# Altium PCB Master_PCB.PcbDoc
Units mm, origin at the board's own origin, x right, y up, seen from the top; angles counter-clockwise.
Board outline 74.5 x 74 mm, 4 copper layers (Top Layer, Mid Layer 1, Mid Layer 2, Bottom Layer), stack 1.57 mm thick; 57 components, 58 nets, 240 pads, 100 vias.
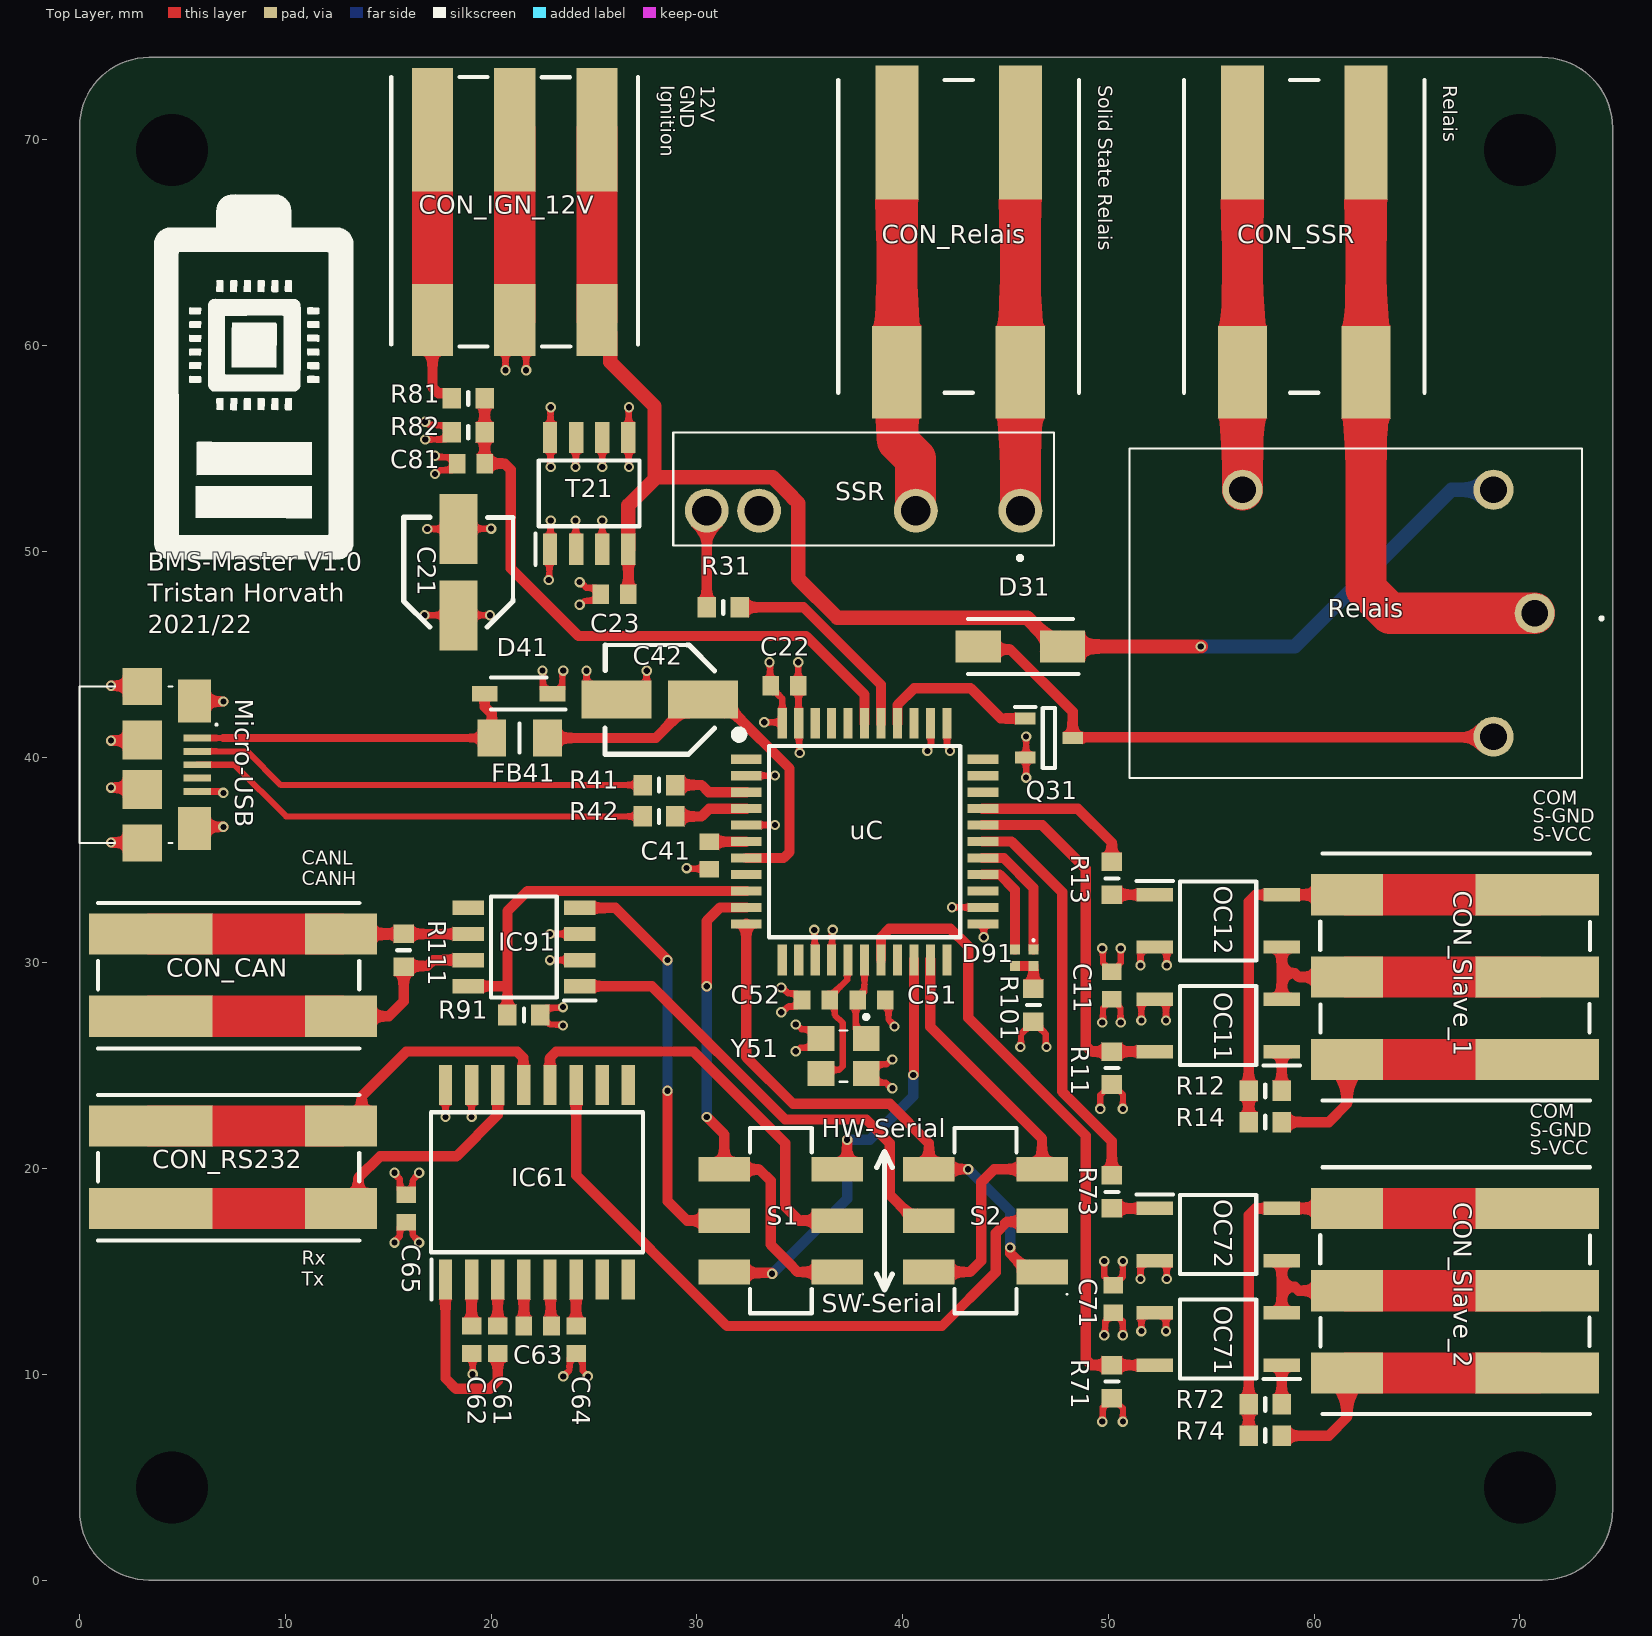
[diagram p0: Top Layer view]
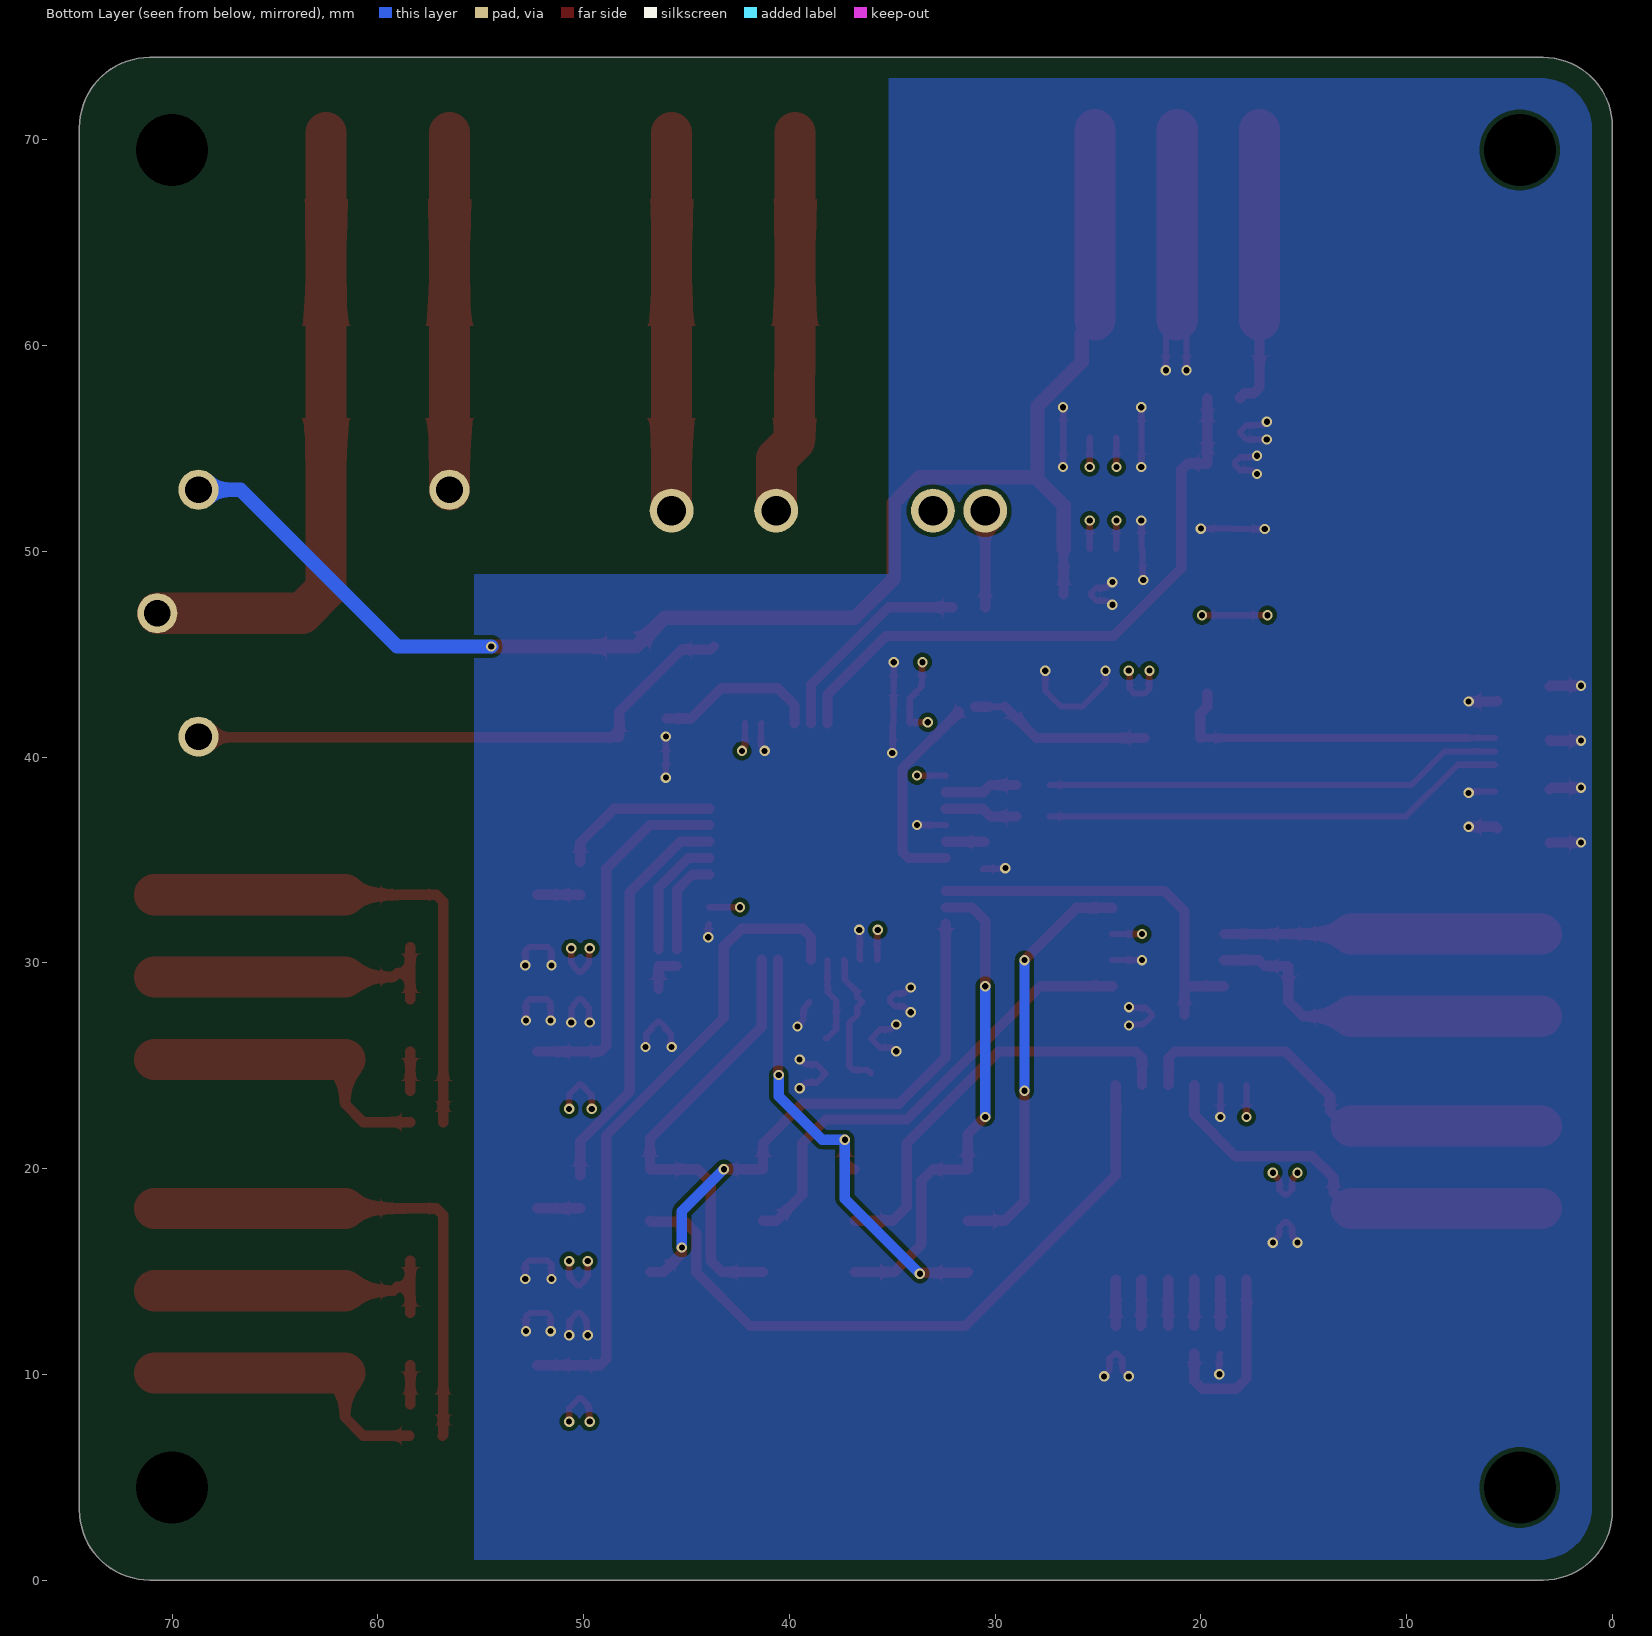
[diagram p1: Bottom Layer view, seen from below]
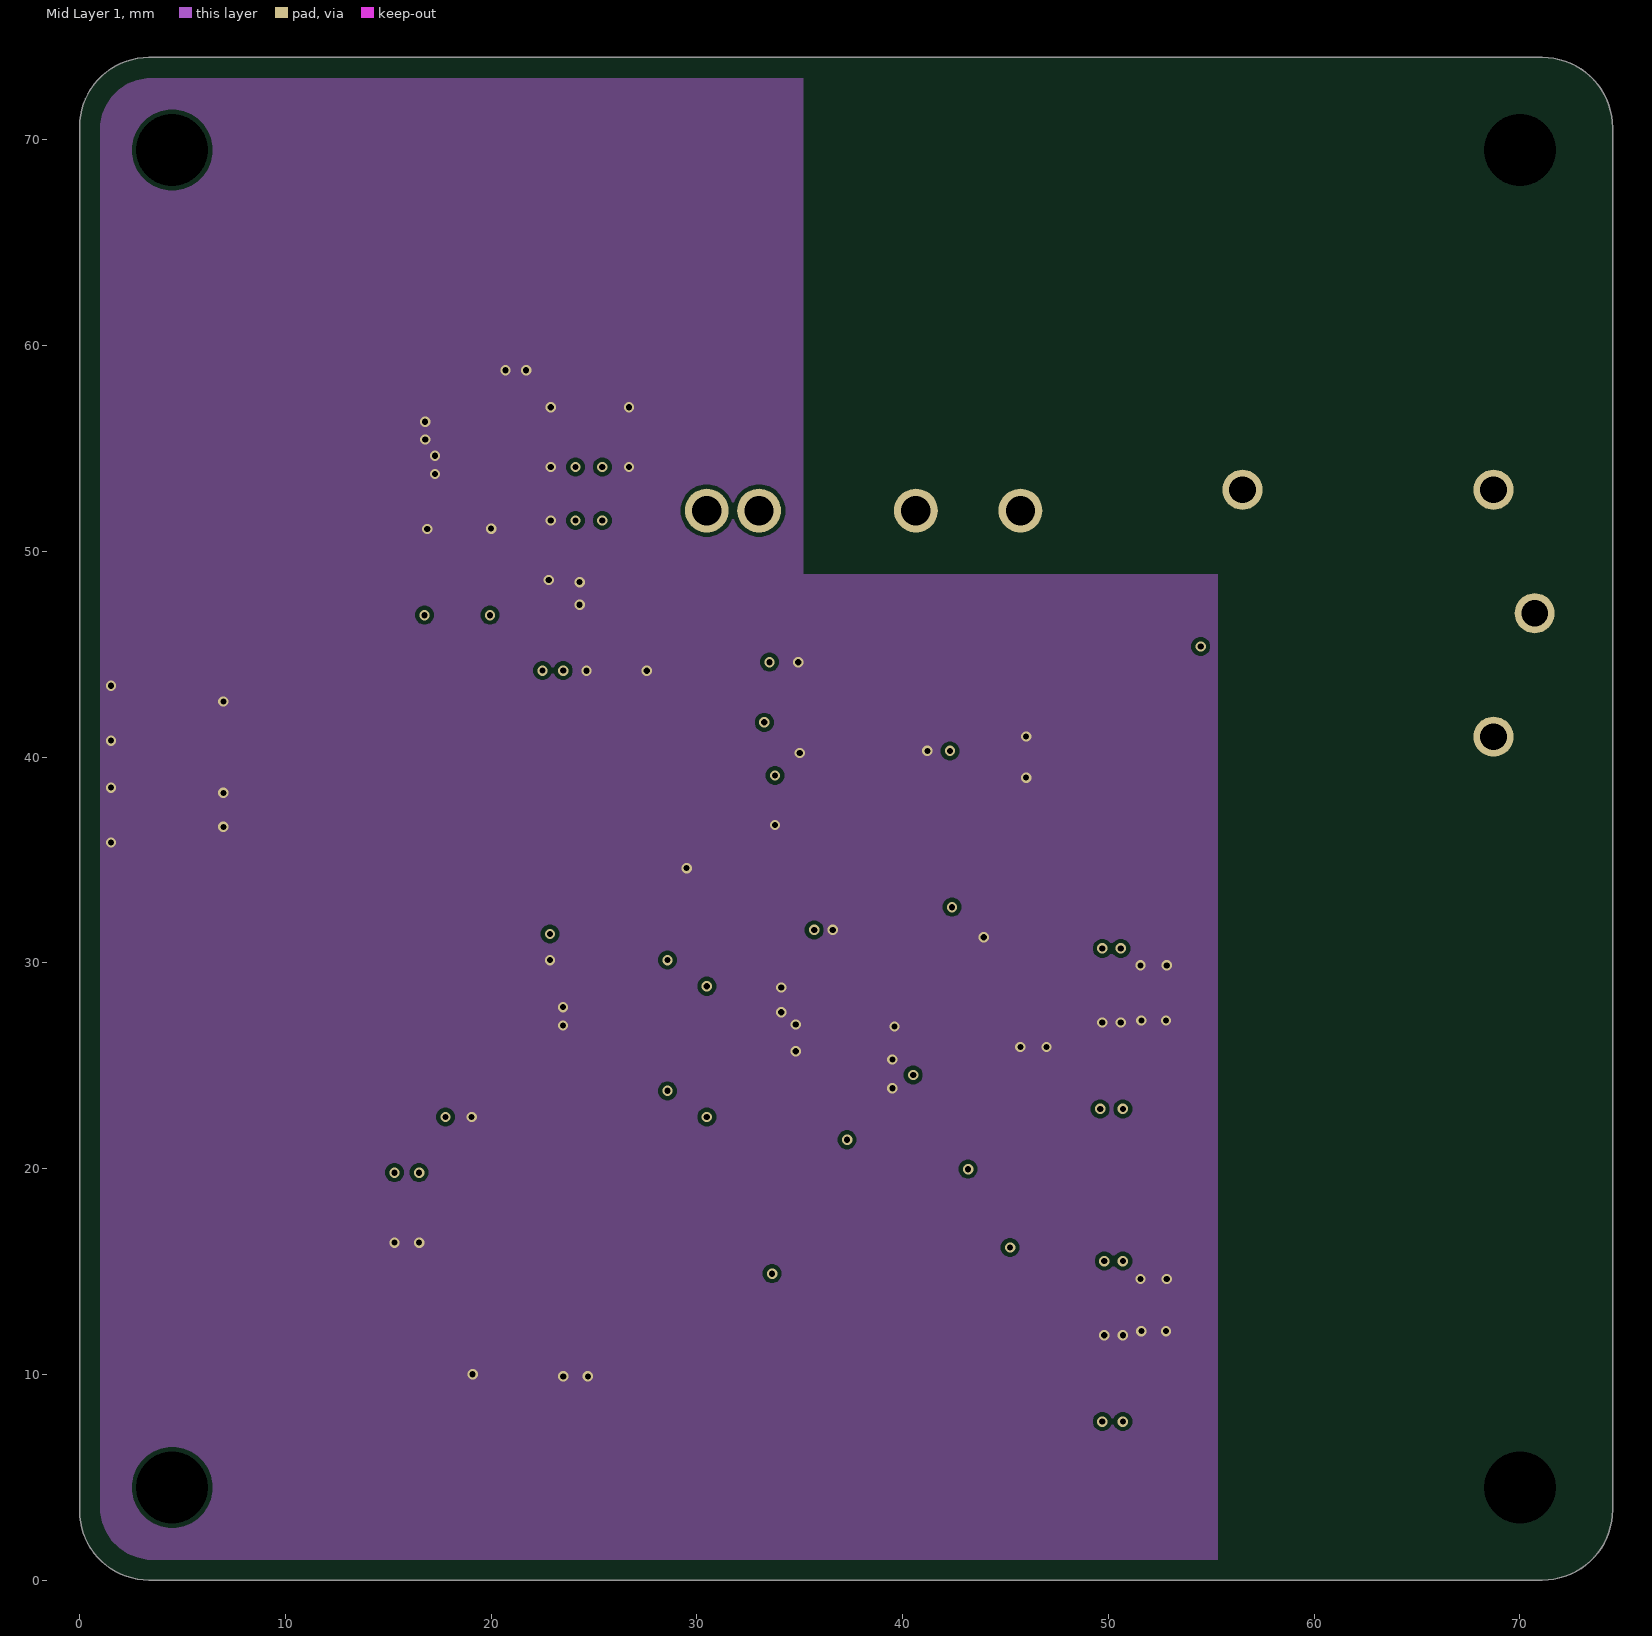
[diagram p2: Mid Layer 1]
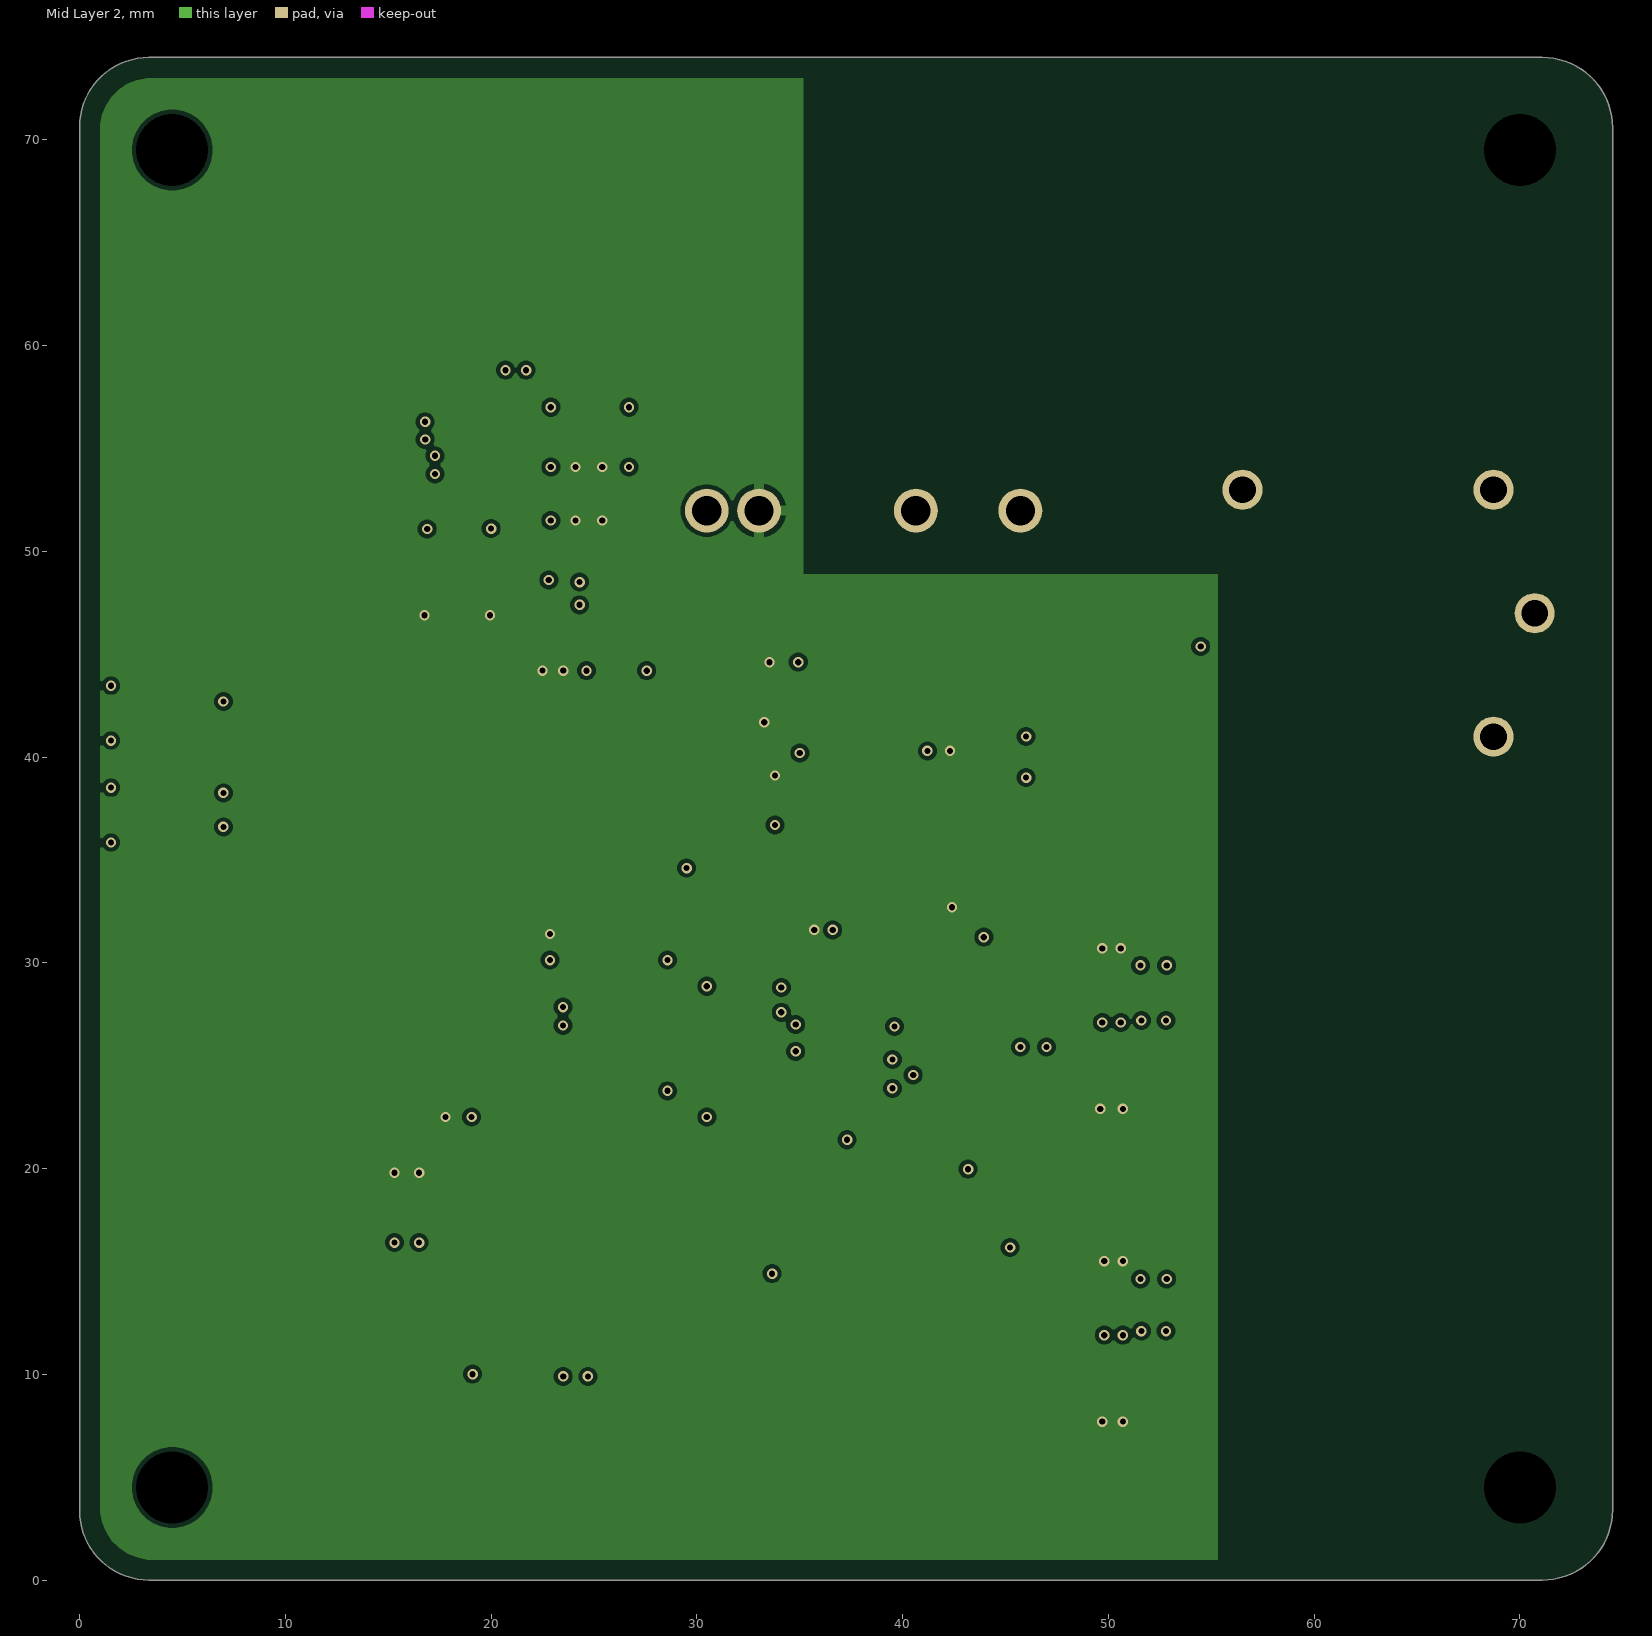
[diagram p3: Mid Layer 2]
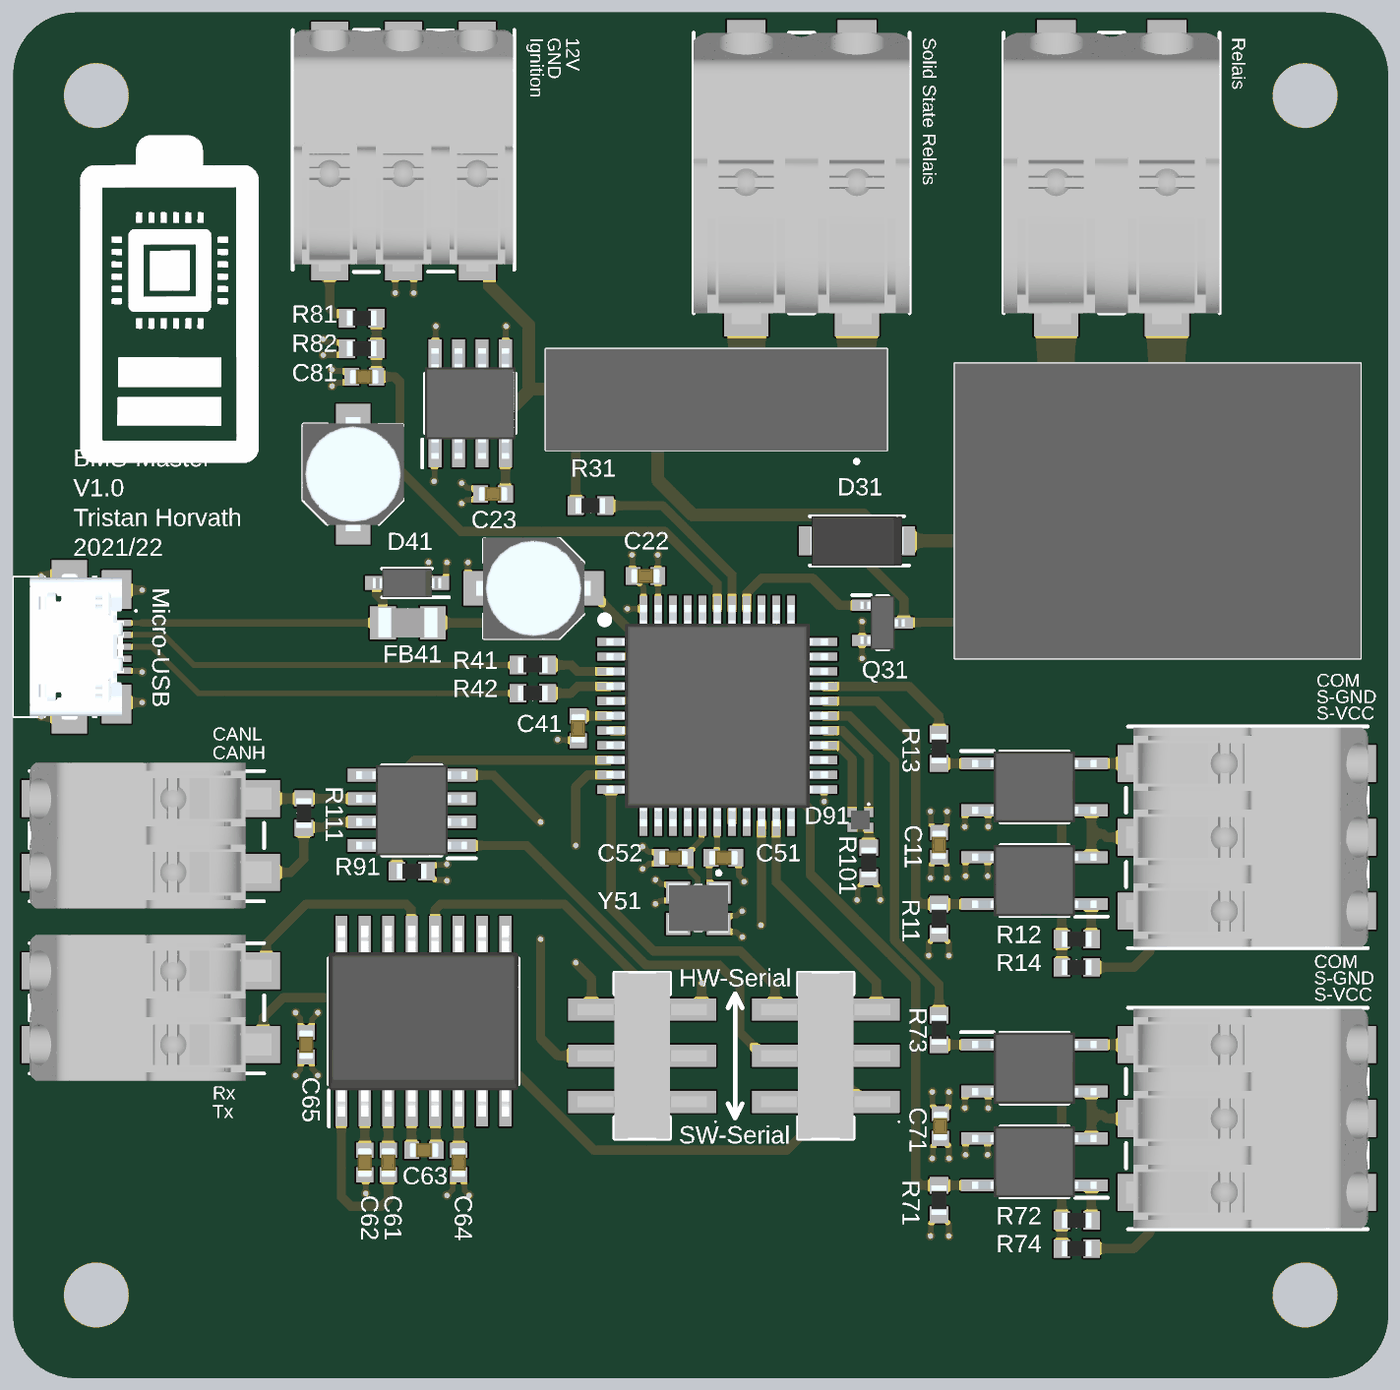
[diagram p4: 3D render of the assembled board from above, using the file's embedded part models]

## Layer stack, top to bottom
Top Solder: solder mask 0.0127, Solder Resist, Dk 3.8
Top Layer: signal copper 0.035
Dielectric 1: prepreg 0.1, 2313, Dk 4.05
Mid Layer 1: signal copper 0.0175
Core: core 1.265, FR-4, Dk 4.5
Mid Layer 2: signal copper 0.0175
Dielectric 2: prepreg 0.1, 2313, Dk 4.05
Bottom Layer: signal copper 0.035
Bottom Solder: solder mask 0.0127, Solder Resist, Dk 3.8

## Board outline
0,3.365 0,70.635 cw(c3.365,70.635) 3.365,74 71.086,74 cw(c71.086,70.586) 74.5,70.586 74.5,3.414 cw(c71.086,3.414) 71.086,0 3.365,0 cw(c3.365,3.365)

## Design rules (kind name [scope] priority, off if disabled: settings)
BoardOutlineClearance [All] p1: gap=0.2 ignorepadtopadclearanceinfootprint=FALSE except(0.4: Arc-SplitBarrior Arc-SplitContinuation Track-SplitBarrior Track-SplitContinuation SMDPad-SplitBarrior SMDPad-SplitContinuation THPad-SplitBarrior THPad-SplitContinuation Via-SplitBarrior Via-SplitContinuation Fill-SplitBarrior Fill-SplitContinuation Poly-SplitBarrior Poly-SplitContinuation Region-SplitBarrior Region-SplitContinuation Text-SplitBarrior Text-SplitContinuation)
Clearance "Clearance Bottom Layer" [OnLayer('Bottom Layer')] p1: gap=0.203 ignorepadtopadclearanceinfootprint=TRUE except(0.254: Arc-Text Track-Text SMDPad-Text THPad-Text Via-Text Fill-Text Poly-Text Region-Text Text-Text)
Clearance "Clearance Top Layer" [OnLayer('Top Layer')] p2: gap=0.203 ignorepadtopadclearanceinfootprint=TRUE except(0.254: Arc-Text Track-Text SMDPad-Text THPad-Text Via-Text Fill-Text Poly-Text Region-Text Text-Text)
Clearance [All] p3: gap=0.2 ignorepadtopadclearanceinfootprint=FALSE except(0.089: Arc-Arc Arc-Track Arc-SMDPad Track-Track Track-SMDPad SMDPad-SMDPad; 0.127: Arc-Via Track-Via SMDPad-Via THPad-Via Via-Via; 0.254: Arc-Text Track-Text SMDPad-Text THPad-Text Via-Text Fill-Text Poly-Text Region-Text Text-Text)
HoleSize [All] p1: absolutevalues=TRUE maxlimit=6.3 minlimit=0.2 maxpercent=80.000 minpercent=20.000
MinimumAnnularRing [All] p1: minimumring=0.076
MinimumSolderMaskSliver [All] p1: minsoldermaskwidth=0.1
PolygonConnect PolygonConnect_1 [All] p1: thpad.connectstyle=Relief thpad.reliefconductorwidth=0.508 thpad.reliefentries=4 thpad.polygonreliefangle="90 Angle" thpad.airgapwidth=0.254 smdpad.connectstyle=Relief smdpad.reliefconductorwidth=0.508 smdpad.reliefentries=4 smdpad.polygonreliefangle="90 Angle" smdpad.airgapwidth=0.254 via.connectstyle=Direct via.reliefconductorwidth=0.508 via.reliefentries=4 via.polygonreliefangle="90 Angle" via.airgapwidth=0.254
RoutingCorners [All] p1: cornerstyle=Round minsetback=2.54 maxsetback=2.54
RoutingVias [All] p1: holewidth=0.5 width=1 viastyle="Through Hole" minholewidth=0.2 minwidth=0.45 maxholewidth=1 maxwidth=2
SilkToSilkClearance [All] p1: silktosilkclearance=0.1
SilkToSolderMaskClearance [IsPad] p1: minsilkscreentomaskgap=0.1 clearancetoexposedcopper=TRUE
SolderMaskExpansion [All] p1: expansion=0.102 istentingtop=FALSE
Width [All] p1: maxlimit=2.54 minlimit=0.089 preferedwidth=0.381
25 further rules are at their usual default settings.

## Components (designator, comment, footprint, x,y, rotation, side; value= is the part's Value field where it differs from the comment)
C11 "100n" CAPC1608X90N 50.165,28.895 r90 top
C21 "47u" CAPAE530X550N 18.415,48.985 r90 top
C22 "100n" CAPC1608X90N 34.255,43.465 r180 top
C23 "470n" CAPC1608X90N 26,47.91 r0 top
C41 "1u" CAPC1608X90N 30.607,35.21 r90 top
C42 "10u" CAPAE530X550N 28.194,42.799 r180 top
C51 "18p" CAPC1608X90N 38.481,28.194 r180 top
C52 "18p" CAPC1608X90N 35.779,28.194 r0 top
C61 "1u" CAPC1608X90N 20.32,11.68 r270 top
C62 "1u" CAPC1608X90N 19.05,11.68 r90 top
C63 "1u" CAPC1608X90N 22.26,12.35 r180 top
C64 "1u" CAPC1608X90N 24.13,11.68 r90 top
C65 "1u" CAPC1608X90N 15.875,18.065 r270 top
C71 "100n" CAPC1608X90N 50.235,13.655 r90 top
C81 "15n" CAPC1608X90N 19.015,54.26 r0 top
CON_CAN "2060-452_998-404" 2060-452998-404 0.892,29.4 r0 top
CON_IGN_12V "2060-453_998-404" 2060-453998-404 21.145,73.053 r270 top
CON_Relais "2061-602_998-404" 2061-602998-404 42.72,72.905 r270 top
CON_RS232 "2060-452_998-404" 2060-452998-404 0.892,20.065 r0 top
CON_Slave_1 "2060-453_998-404" 2060-453998-404 73.403,29.305 r180 top
CON_Slave_2 "2060-453_998-404" 2060-453998-404 73.403,14.065 r180 top
CON_SSR "2061-602_998-404" 2061-602998-404 59.515,72.905 r270 top
D31 "ES1D-E3_61T" DIOM5127X229N 45.72,45.37 r180 top
D41 "BAT43W-E3-08" SOD3716X135N 21.336,43.084 r180 top
D91 "SML-P24MUWT86R" SMLP24MUWT86R 45.905,30.245 r180 top
FB41 "BLM31AJ601SN1L" BEADC3216X130N 21.383,40.925 r180 top
IC61 "MAX232IDWR" SOIC127P1030X265-16N 22.225,19.335 r90 top
IC91 "MCP2551-I_SN" SOIC127P600X175-8N 21.59,30.765 r180 top
Micro-USB "10118192-0002LF" 101181920002LF 2.853,39.625 r270 top
OC11 "FODM121GR4" SOP254P675X240-4N 55.332,26.955 r180 top
OC12 "FODM121GR4" SOP254P675X240-4N 55.332,32.035 r0 top
OC71 "FODM121GR4" SOP254P675X240-4N 55.332,11.715 r180 top
OC72 "FODM121GR4" SOP254P675X240-4N 55.332,16.795 r0 top
Q31 "XP234N0801TR-G" SOT95P240X115-3N 47.11,40.925 r0 top
R11 "10k" RESC1608X55N 50.165,24.885 r270 top
R12 "10k" RESC1608X55N 57.62,23.78 r180 top
R13 "1k" RESC1608X55N 50.165,34.105 r90 top
R14 "1k" RESC1608X55N 57.62,22.256 r0 top
R31 "220" RESC1608X55N 31.28,47.275 r180 top
R41 "22" RESC1608X55N 28.156,38.639 r180 top
R42 "22" RESC1608X55N 28.156,37.115 r180 top
R71 "10k" RESC1608X55N 50.165,9.645 r270 top
R72 "10k" RESC1608X55N 57.62,8.54 r180 top
R73 "1k" RESC1608X55N 50.165,18.865 r90 top
R74 "1k" RESC1608X55N 57.62,7.016 r0 top
R81 "18k" RESC1608X55N 18.885,57.435 r180 top
R82 "12k" RESC1608X55N 18.885,55.784 r0 top
R91 "N.P." RESC1608X55N 21.59,27.463 r0 top
R101 "220" RESC1608X55N 46.355,27.94 r90 top
R111 "120" RESC1608X55N 15.748,30.607 r90 top
Relais "JS1A-12V-F" JS1A12VF 70.715,46.99 r180 top
S1 "JS202011SCQN" JS202011SCQN 34.08,17.47 r90 top
S2 "JS202011SCQN" JS202011SCQN 44.025,17.47 r90 top
SSR "S202S02F" S202S12 38.1,52.674 r180 top
T21 "MC33269D-5.0G" SOIC127P600X175-8N 24.765,52.818 r90 top
uC "ATMEGA32U4RC-AU" QFP80P1200X1200X120-44N 38.147,35.892 r0 top
Y51 "QC3CA16.0000F12B23R" QC3CA160000F12B23R 37.127,25.47 r180 top

## Footprints (in the part's own frame and the unit in brackets; to place one, negate y for a bottom-side part, rotate by r counter-clockwise, add the part's x,y. Pads: shape width x height; smd on the part's side, far side on the other; paste and mask are expansions set on the pad)
2060-452998-404 [mm]
  rect 3.5x2 smd: 1(11.808,-2) 3(11.808,2)
  rect 6x2 smd: 2(2.558,-2) 4(2.558,2)
  silkscreen extent 0,-3.57 12.7,3.5, body extent 0,-3.95 13.1,3.95, height 5.5
2060-453998-404 [mm]
  rect 3.5x2 smd: 1(11.808,-4) 3(11.808,0) 5(11.808,4)
  rect 6x2 smd: 2(2.558,-4) 4(2.558,0) 6(2.558,4)
  silkscreen extent 0,-6 13.11,6, body extent 0,-5.95 13.1,5.95, height 5.5
2061-602998-404 [mm]
  rect 4.5x2.4 smd: 1(14.2,-3) 3(14.2,3)
  rect 6.5x2.1 smd: 2(2.558,-3) 4(2.558,3)
  silkscreen extent 0,-5.85 15.2,5.85, body extent 0,-5.85 15.8,5.85, height 6.75
101181920002LF [mm]
  rect 0.34x1.35 smd: 1(-1.3,2.862) 2(-0.65,2.862) 3(0,2.862) 4(0.65,2.862) 5(1.3,2.862)
  rect 2.1x1.6 smd: MP1(-3.1,2.737) MP6(3.1,2.737)
  rect 1.8x1.9 smd: MP2(-3.8,0.188) MP5(3.8,0.188)
  rect 1.9x1.9 smd: MP3(-1.2,0.188) MP4(1.2,0.188)
  silkscreen extent -3.8,-2.86 3.8,3.85, body extent -3.95,-1.95 3.95,3.15, height 2.77
BEADC3216X130N [mm]
  rect 1.4x1.8 smd: 1(-1.35,0) 2(1.35,0)
  silkscreen extent 0,-0.7 0,0.7, body extent -1.6,-0.8 1.6,0.8, height 1.3
CAPAE530X550N [mm]
  rect 3.4x1.85 smd: 1(-2.1,0) 2(2.1,0)
  silkscreen extent -2.67,-2.65 2.67,2.67, body extent -3.1,-2.75 3.1,2.75, height 5.5
CAPC1608X90N [mm]
  rect 0.81x0.94 smd: 1(-0.67,0) 2(0.67,0)
  body extent -0.8,-0.4 0.8,0.4, height 0.9
DIOM5127X229N [mm]
  rect 2.2x1.55 smd: 1(-2.05,0) 2(2.05,0)
  silkscreen extent -2.82,-1.33 2.55,1.33, body extent -2.55,-1.33 2.55,1.33, height 2.29
JS1A12VF [mm]
  round 1.95 hole 1.3: 1(0,0) 2(2,-6) 3(14.2,-6) 4(2,6)
  silkscreen extent -3.3,-8 19.7,8, body extent -2.3,-8 19.7,8, height 16.5
JS202011SCQN [mm]
  rect 1.2x2.5 smd: 1(-2.5,-2.75) 2(0,-2.75) 3(2.5,-2.75) 4(2.5,2.75) 5(0,2.75) 6(-2.5,2.75)
  silkscreen extent -4.5,-4 4.5,1.5, body extent -4.5,-3.5 4.5,3.5, height 5.65
QC3CA160000F12B23R [mm]
  rect 1.3x1.2 smd: 1(-1.1,-0.85) 2(1.1,-0.85) 3(1.1,0.85) 4(-1.1,0.85)
  silkscreen extent -1.2,-2 0.2,1.25, body extent -1.63,-1.33 1.63,1.33, height 1.2
QFP80P1200X1200X120-44N [mm]
  rect 1.5x0.446 smd: 1(-5.75,4) 2(-5.75,3.2) 3(-5.75,2.4) 4(-5.75,1.6) 5(-5.75,0.8) 6(-5.75,0) 7(-5.75,-0.8) 8(-5.75,-1.6) 9(-5.75,-2.4) 10(-5.75,-3.2) 11(-5.75,-4) 23(5.75,-4) 24(5.75,-3.2) 25(5.75,-2.4) 26(5.75,-1.6) 27(5.75,-0.8) 28(5.75,0) 29(5.75,0.8) 30(5.75,1.6) 31(5.75,2.4) 32(5.75,3.2) 33(5.75,4)
  rect 0.446x1.5 smd: 12(-4,-5.75) 13(-3.2,-5.75) 14(-2.4,-5.75) 15(-1.6,-5.75) 16(-0.8,-5.75) 17(0,-5.75) 18(0.8,-5.75) 19(1.6,-5.75) 20(2.4,-5.75) 21(3.2,-5.75) 22(4,-5.75) 34(4,5.75) 35(3.2,5.75) 36(2.4,5.75) 37(1.6,5.75) 38(0.8,5.75) 39(0,5.75) 40(-0.8,5.75) 41(-1.6,5.75) 42(-2.4,5.75) 43(-3.2,5.75) 44(-4,5.75)
  silkscreen extent -6.3,-4.65 4.65,5.4, body extent -6,-6 6,6, height 1.2
RESC1608X55N [mm]
  rect 0.9x1 smd: 1(-0.8,0) 2(0.8,0)
  silkscreen extent 0,-0.31 0,0.31, body extent -0.8,-0.41 0.8,0.41, height 0.55
S202S12 [mm]
  round 2.13 hole 1.42: 1(-7.62,0.7) 2(-2.54,0.7) 3(5.08,0.7) 4(7.62,0.7)
  silkscreen extent -9.25,-3.1 9.25,3.1, body extent -9.25,-3.1 9.25,2.4, height 5.1
SMLP24MUWT86R [mm]
  rect 0.5x0.5 smd mask+0.05: 1(-0.45,-0.4) 2(0.45,-0.4) 3(0.45,0.4) 4(-0.45,0.4)
  silkscreen extent -0.5,-0.9 -0.4,-0.8, body extent -0.5,-0.5 0.5,0.5, height 0.35
SOD3716X135N [mm]
  rect 1.25x0.75 smd: 1(-1.65,0) 2(1.65,0)
  silkscreen extent -2.27,-0.78 1.35,0.78, body extent -1.85,-0.77 1.85,0.77, height 1.35
SOIC127P600X175-8N [mm]
  rect 1.525x0.7 smd: 1(-2.712,1.905) 2(-2.712,0.635) 3(-2.712,-0.635) 4(-2.712,-1.905) 5(2.712,-1.905) 6(2.712,-0.635) 7(2.712,0.635) 8(2.712,1.905)
  silkscreen extent -3.48,-2.45 1.6,2.61, body extent -3,-2.45 3,2.45, height 1.75
SOIC127P1030X265-16N [mm]
  rect 1.95x0.65 smd: 1(-4.725,4.445) 2(-4.725,3.175) 3(-4.725,1.905) 4(-4.725,0.635) 5(-4.725,-0.635) 6(-4.725,-1.905) 7(-4.725,-3.175) 8(-4.725,-4.445) 9(4.725,-4.445) 10(4.725,-3.175) 11(4.725,-1.905) 12(4.725,-0.635) 13(4.725,0.635) 14(4.725,1.905) 15(4.725,3.175) 16(4.725,4.445)
  silkscreen extent -5.7,-5.15 3.4,5.15, body extent -5.17,-5.15 5.17,5.15, height 2.59
SOP254P675X240-4N [mm]
  rect 1.775x0.65 smd: 1(-3.088,1.27) 2(-3.088,-1.27) 3(3.088,-1.27) 4(3.088,1.27)
  silkscreen extent -3.98,-1.93 1.85,1.94, body extent -3.37,-1.92 3.37,1.92, height 2.4
SOT95P240X115-3N [mm]
  rect 1x0.6 smd: 1(-1.15,0.95) 2(-1.15,-0.95) 3(1.15,0)
  silkscreen extent -1.65,-1.45 0.3,1.5, body extent -1.2,-1.45 1.2,1.45, height 1.15

## Part data
C11 C22 C23 C41 C51 C52 C61 C62 C63 C64 C65 C71 C81: library part CAP
C21 C42: library part ELKO
CON_CAN CON_RS232: "Connector", Arrow Part Number=2060-452/998-404, Manufacturer_Name=Wago, Manufacturer_Part_Number=2061-602/998-404, Arrow Price/Stock=https://www.arrow.com/en/products/2060-452998-404/wago-kontakttechnik-gmbh?region=nac
CON_IGN_12V CON_Relais CON_Slave_1 CON_Slave_2 CON_SSR: "Connector", Arrow Part Number=2060-452/998-404, Manufacturer_Name=Wago, Arrow Price/Stock=https://www.arrow.com/en/products/2060-452998-404/wago-kontakttechnik-gmbh?region=nac, Manufacturer_Part_Number=2060-452/998-404
D31: "Diode", Arrow Part Number=ES1D-E3/61T, Manufacturer_Name=Vishay, Mouser Part Number=625-ES1D-E3, Arrow Price/Stock=https://www.arrow.com/en/products/es1d-e361t/vishay, Datasheet Link=https://componentsearchengine.com/Datasheets/2/ES1D-E3_61T.pdf, Height=2.29mm, Manufacturer_Part_Number=ES1D-E3/61T, Mouser Price/Stock=https://www.mouser.co.uk/ProductDetail/Vishay-General-Semiconductor/ES1D-E3-61T?qs=rfh7uIuiIO0XwaKoN5aNdQ%3D%3D
D41: "Diode", Manufacturer_Name=Vishay, Mouser Part Number=78-BAT43W-E3-08, Arrow Part Number=BAT43W-E3-08, Arrow Price/Stock=https://www.arrow.com/en/products/bat43w-e3-08/vishay?region=nac, Datasheet Link=https://www.arrow.com/en/products/bat43w-e3-08/vishay, Height=1.35mm, Manufacturer_Part_Number=BAT43W-E3-08, Mouser Price/Stock=https://www.mouser.co.uk/ProductDetail/Vishay-Semiconductors/BAT43W-E3-08?qs=KP8Io%2FXyE5RCw3lmmA3XwQ%3D%3D
D91: "LED", Manufacturer_Name="ROHM Semiconductor", Mouser Part Number=755-SML-P24MUWT86R, Datasheet Link=https://datasheet.datasheetarchive.com/originals/distributors/DKDS-18/357144.pdf, Height=0.25mm, Manufacturer_Part_Number=SML-P24MUWT86R, Mouser Price/Stock=https://www.mouser.co.uk/ProductDetail/ROHM-Semiconductor/SML-P24MUWT86R?qs=SP2aZMzhwxgr8eZ6SbTI9w%3D%3D
FB41: "Ferrite Bead", Manufacturer_Name="Murata Electronics", Mouser Part Number=81-BLM31A601S, Arrow Part Number=BLM31AJ601SN1L, Arrow Price/Stock=https://www.arrow.com/en/products/blm31aj601sn1l/murata-manufacturing, Datasheet Link=https://www.mouser.com/datasheet/2/281/c31e-794748.pdf, Height=1.3mm, Manufacturer_Part_Number=BLM31AJ601SN1L, Mouser Price/Stock=https://www.mouser.co.uk/ProductDetail/Murata-Electronics/BLM31AJ601SN1L?qs=eh6oC%2F9l24qWxAxwNnqXlg%3D%3D
IC61: "Integrated Circuit", Manufacturer_Name="Texas Instruments", Mouser Part Number=595-MAX232IDWR, Arrow Part Number=MAX232IDWR, Arrow Price/Stock=https://www.arrow.com/en/products/max232idwr/texas-instruments?region=nac, Datasheet Link=http://www.ti.com/lit/gpn/max232?HQS=ti-null-null-sf-df-pf-sep-wwe&DCM=yes, Height=2.65mm, Manufacturer_Part_Number=MAX232IDWR, Mouser Price/Stock=https://www.mouser.co.uk/ProductDetail/Texas-Instruments/MAX232IDWR?qs=NLW4NjXEBS5p6v4OAKxw4g%3D%3D
IC91: "Integrated Circuit", Arrow Part Number=MCP2551-I/SN, Manufacturer_Name=Microchip, Mouser Part Number=579-MCP2551-I/SN, Arrow Price/Stock=https://www.arrow.com/en/products/mcp2551-isn/microchip-technology?region=nac, Datasheet Link=https://datasheet.datasheetarchive.com/originals/distributors/Datasheets-34/DSA-674994.pdf, Height=1.75mm, Manufacturer_Part_Number=MCP2551-I/SN, Mouser Price/Stock=https://www.mouser.co.uk/ProductDetail/Microchip-Technology/MCP2551-I-SN?qs=9y3LFqDLL8L5zFfqqxdOHg%3D%3D
Micro-USB: "Connector", Manufacturer_Name=Amphenol, Mouser Part Number=649-10118192-0002LF, Arrow Part Number=10118192-0002LF, Arrow Price/Stock=https://www.arrow.com/en/products/10118192-0002lf/amphenol-fci?region=nac, Datasheet Link=https://componentsearchengine.com/Datasheets/1/10118192-0002LF.pdf, Height=3.05mm, Manufacturer_Part_Number=10118192-0002LF, Mouser Price/Stock=https://www.mouser.co.uk/ProductDetail/Amphenol-FCI/10118192-0002LF?qs=KVgMXE4aH4nIkuWlMxQzog%3D%3D
OC11 OC12 OC71 OC72: "Integrated Circuit", Manufacturer_Name="ON Semiconductor", Mouser Part Number=863-FODM121GR4, Datasheet Link=https://www.onsemi.com/pub/Collateral/FODM2705-D.pdf, Height=2.4mm, Manufacturer_Part_Number=FODM121GR4, Mouser Price/Stock=https://www.mouser.co.uk/ProductDetail/onsemi/FODM121GR4?qs=byeeYqUIh0Okw76KHw6rZA%3D%3D
Q31: "MOSFET (N-Channel)", Manufacturer_Name=Torex, Mouser Part Number=865-XP234N0801TR-G, Datasheet Link=https://4donline.ihs.com/images/VipMasterIC/IC/TOSL/TOSL-S-A0008892481/TOSL-S-A0008892481-1.pdf?hkey=CECEF36DEECDED6468708AAF2E19C0C6, Height=1.15mm, Manufacturer_Part_Number=XP234N0801TR-G, Mouser Price/Stock=https://www.mouser.co.uk/ProductDetail/Torex-Semiconductor/XP234N0801TR-G?qs=BJlw7L4Cy7%252BWe%2FbHvnXcKQ%3D%3D
R11 R12 R13 R14 R31 R41 R42 R71 R72 R73 R74 R81 R82 R91 R101 R111: library part RES
Relais: "Relay or Contactor", Manufacturer_Name=Panasonic, Mouser Part Number=769-JS1A-12V-F, Arrow Part Number=JS1A-12V-F, Arrow Price/Stock=https://www.arrow.com/en/products/js1a-12v-f/panasonic, Datasheet Link=https://componentsearchengine.com/Datasheets/2/JS1A-12V-F.pdf, Height=16.4mm, Manufacturer_Part_Number=JS1A-12V-F, Mouser Price/Stock=https://www.mouser.co.uk/ProductDetail/Panasonic/JS1A-12V-F?qs=sEN%2FkO1EG6bHk8GQE7PEaQ%3D%3D
S1 S2: "Switch", Manufacturer_Name="C & K COMPONENTS", Mouser Part Number=611-JS202011SCQN, Arrow Part Number=JS202011SCQN, Arrow Price/Stock=https://www.arrow.com/en/products/js202011scqn/ck?region=nac, Datasheet Link=http://www.ckswitches.com/media/1422/js.pdf, Height=5.5mm, Manufacturer_Part_Number=JS202011SCQN, Mouser Price/Stock=https://www.mouser.co.uk/ProductDetail/CK/JS202011SCQN?qs=LgMIjt8LuD95JYWxZ7NvZA%3D%3D
SSR: "Relay or Contactor", Manufacturer_Name="Sharp Microelectronics", Mouser Part Number=N/A, Datasheet Link=https://componentsearchengine.com/Datasheets/1/S202S02F.pdf, Height=5mm, Manufacturer_Part_Number=S202S02F, Mouser Price/Stock=https://www.mouser.co.uk/ProductDetail/Sharp-Microelectronics/S202S02F?qs=ijfXDZrNBl2UPSyCAmWZ0A%3D%3D
T21: "Integrated Circuit", Manufacturer_Name="ON Semiconductor", Mouser Part Number=863-MC33269D-5.0G, Arrow Part Number=MC33269D-5.0G, Arrow Price/Stock=https://www.arrow.com/en/products/mc33269d-5.0g/on-semiconductor?region=nac, Datasheet Link=http://www.onsemi.com/pub/Collateral/MC33269-D.PDF, Height=1.75mm, Manufacturer_Part_Number=MC33269D-5.0G, Mouser Price/Stock=https://www.mouser.co.uk/ProductDetail/onsemi/MC33269D-50G?qs=dFKnUM%2FquJZ0YuZ%252B66PKCA%3D%3D
uC: "Integrated Circuit", Manufacturer_Name=Microchip, Mouser Part Number=556-ATMEGA32U4RC-AU, Arrow Part Number=ATMEGA32U4RC-AU, Arrow Price/Stock=https://www.arrow.com/en/products/atmega32u4rc-au/microchip-technology?region=nac, Datasheet Link=http://uk.rs-online.com/web/p/products/7380451, Height=1.2mm, Manufacturer_Part_Number=ATMEGA32U4RC-AU, Mouser Price/Stock=https://www.mouser.co.uk/ProductDetail/Microchip-Technology-Atmel/ATMEGA32U4RC-AU?qs=7AReRZHh%2FSt%252BRqfzkW8%2FkA%3D%3D
Y51: "Crystal or Oscillator", Manufacturer_Name=Qantek, Height=1.1mm, Manufacturer_Part_Number=QC3CA16.0000F12B23R

## Free pads (board coordinates)
  round 1.524 hole 3.5: 2(4.5,4.5) 2(4.5,69.5) 2(70,4.5) 2(70,69.5)

## Via types
v1: diameter 0.5, hole 0.3, Top Layer to Bottom Layer, tented both sides, 100 vias

## Nets (pads, with @x,y where several pads share a name; then routed paths per layer and width w, separated by ;. In a path a pad name is that pad's centre, name@x,y a point inside that pad or via, vN(x,y) a via of type N, cw(c..) or ccw(c..) an arc to the next point about the centre after c; other vN are vias at no path point)
M_GND: C11.1 C21.2 C22.1 C23.1 C41.1 C42.2 C51.1 C52.1 C62.1 C64.1 C65.2 C71.1 C81.1 CON_IGN_12V.3 CON_IGN_12V.4 IC61.15 IC91.2 Micro-USB.5 Micro-USB.MP1 Micro-USB.MP2 Micro-USB.MP3 Micro-USB.MP4 Micro-USB.MP5 Micro-USB.MP6 OC11.3 OC12.2 OC71.3 OC72.2 Q31.2 R82.1 R91.2 R101.1 T21.1 T21.5 T21.8 uC.5 uC.15 uC.23 uC.35 uC.43 Y51.2 Y51.4 | length 104.8
  Top Layer w0.3: Micro-USB.5 6.864,38.325 6.931,38.258 v1(6.985,38.258) ; v1(15.3,16.4) 15.3,16.454 15.555,16.709 15.555,17.14 15.81,17.395 15.94,17.395 16.195,17.14 16.195,16.759 16.5,16.454 v1(16.5,16.4) ; v1(16.791,56.292) 16.818,56.292 16.976,56.134 17.785,56.134 18.085,55.834 18.085,55.734 17.785,55.434 v1(16.795,55.434) ; v1(16.891,51.085) C21.2 18.43,51.1 v1(20,51.1) ; v1(17.272,53.752) 17.326,53.752 17.514,53.94 18.09,53.94 18.345,54.195 18.345,54.325 18.09,54.58 17.474,54.58 17.451,54.603 17.31,54.603 v1(17.272,54.641) ; C62.1 19.1,10.96 v1(19.1,10.005) ; v1(19.05,22.51) IC61.15 ; v1(20.7,58.8) 20.7,60.8 CON_IGN_12V.3 21.7,60.69 v1(21.7,58.8) ; v1(22.8,48.6) 22.83,48.63 22.83,50.076 22.88,50.126 22.88,51.48 v1(22.9,51.5) ; v1(22.86,30.13) IC91.2 ; v1(22.9,54.1) 22.88,54.12 22.88,55.51 T21.8 22.88,55.55 22.88,56.98 v1(22.9,57) ; v1(23.495,26.955) 23.457,26.993 22.86,26.993 22.74,27.113 22.69,27.113 22.39,27.413 R91.2 22.39,27.513 22.69,27.813 23.464,27.813 v1(23.495,27.844) ; v1(23.5,9.9) 23.81,10.21 23.81,10.755 24.065,11.01 24.195,11.01 24.45,10.755 24.45,10.176 24.7,9.926 v1(24.7,9.9) ; v1(24.3,47.4) 24.354,47.4 24.544,47.59 25.075,47.59 25.33,47.845 25.33,47.975 25.075,48.23 24.624,48.23 24.354,48.5 v1(24.3,48.5) ; v1(24.638,44.196) 24.638,43.574 25.763,42.449 26.784,42.449 27.559,43.224 v1(27.559,44.196) ; v1(26.7,54.1) 26.685,54.115 26.685,55.515 T21.5 26.685,55.545 26.685,56.985 v1(26.7,57) ; v1(29.5,34.6) 29.53,34.57 30.577,34.57 C41.1 ; uC.5 32.401,36.696 33.796,36.696 v1(33.8,36.7) ; v1(34.1,27.596) 34.154,27.596 34.432,27.874 34.854,27.874 35.109,28.129 35.109,28.259 34.854,28.514 34.436,28.514 34.154,28.796 v1(34.1,28.796) ; v1(34.8,25.7) 34.854,25.7 35.024,25.87 35.577,25.87 Y51.2 35.577,26.77 35.084,26.77 34.854,27 v1(34.8,27) ; v1(34.925,44.608) C22.1 34.936,43.454 34.936,41.653 uC.43 34.973,41.615 34.973,40.227 v1(35,40.2) ; uC.15 36.573,30.168 36.573,31.573 v1(36.6,31.6) ; C51.1@39.059,28.098 39.059,28.033 39.314,27.778 39.314,27.24 39.6,26.954 v1(39.6,26.9) ; v1(39.5,23.9) 39.446,23.9 39.176,24.17 38.677,24.17 Y51.4 38.677,25.07 39.216,25.07 39.446,25.3 v1(39.5,25.3) ; v1(41.2,40.3) 41.2,40.354 41.374,40.529 41.374,41.614 uC.35 ; uC.23 43.942,31.847 v1(43.942,31.242) ; v1(45.72,25.908) 45.758,25.946 45.758,26.543 46.005,26.79 46.005,26.84 46.305,27.14 R101.1 46.405,27.14 46.705,26.84 46.705,26.79 46.952,26.543 46.952,25.946 v1(46.99,25.908) ; v1(46,39) 46,39.935 Q31.2 46,40.015 v1(46,41) ; v1(49.7,27.1) 49.738,27.138 49.738,27.798 49.845,27.905 49.845,27.97 50.1,28.225 50.23,28.225 50.485,27.97 50.485,27.905 50.59,27.8 50.59,27.11 v1(50.6,27.1) ; v1(49.8,11.9) 49.838,11.938 49.838,12.588 49.915,12.665 49.915,12.73 50.17,12.985 50.3,12.985 50.7,12.585 v1(50.7,11.9) ; v1(51.562,14.636) 51.562,15.35 51.737,15.525 OC72.2 52.657,15.525 52.832,15.35 v1(52.832,14.636) ; v1(51.562,29.876) 51.562,30.59 51.737,30.765 OC12.2 52.657,30.765 52.832,30.59 v1(52.832,29.876) ; v1(51.6,12.1) 51.6,12.81 51.775,12.985 52.625,12.985 52.8,12.81 v1(52.8,12.1) ; v1(51.6,27.2) 51.6,28.05 51.775,28.225 52.625,28.225 52.8,28.05 v1(52.8,27.2)
  Top Layer w0.5: v1(1.524,35.845) 3.021,35.845 Micro-USB.MP5 ; v1(1.524,38.512) 2.954,38.512 Micro-USB.MP4 ; v1(1.524,40.798) 3.014,40.798 Micro-USB.MP3 ; v1(1.524,43.465) 3.001,43.465 Micro-USB.MP2 ; Micro-USB.MP6 5.672,36.607 v1(6.985,36.607) ; Micro-USB.MP1 5.612,42.703 v1(6.985,42.703)
  Top Layer w2: CON_IGN_12V.3 CON_IGN_12V.4
M_Vcc: C11.2 C21.1 C22.2 C65.1 C71.2 D41.1 IC61.16 IC91.3 R11.2 R71.2 SSR.3 T21.2 T21.3 T21.6 T21.7 uC.2 uC.14 uC.24 uC.34 uC.44 | length 39.1
  Top Layer w0.3: v1(15.3,19.8) 15.3,19.746 15.555,19.491 15.555,18.99 15.81,18.735 15.94,18.735 16.195,18.99 16.195,19.441 16.5,19.746 v1(16.5,19.8) ; v1(16.764,46.894) 18.406,46.894 C21.1 18.424,46.894 v1(19.939,46.894) ; v1(17.78,22.51) IC61.16 ; v1(22.5,44.2) 22.511,44.189 22.511,43.309 22.736,43.084 23.236,43.084 23.461,43.309 23.461,44.107 23.5,44.146 v1(23.5,44.2) ; v1(22.86,31.4) IC91.3 ; v1(24.1,51.5) 24.115,51.485 24.115,50.121 T21.2 ; v1(24.1,54.1) 24.115,54.115 24.115,55.515 T21.7 ; T21.3 v1(25.4,51.5) ; v1(25.4,54.1) T21.6 ; uC.2 32.401,39.096 33.796,39.096 v1(33.8,39.1) ; SSR.3@33.02,51.479 SSR.3 ; v1(33.274,41.687) 34.102,41.687 uC.44 34.147,42.842 33.844,43.145 33.84,43.145 33.585,43.4 C22.2 33.585,43.53 33.556,43.559 33.556,44.58 v1(33.528,44.608) ; v1(35.7,31.6) 35.723,31.577 35.723,30.165 uC.14 ; uC.34 42.155,41.633 42.155,40.499 42.3,40.354 v1(42.3,40.3) ; v1(42.4,32.7) 42.404,32.696 43.893,32.696 uC.24 ; v1(49.6,22.9) 49.6,23.57 50.115,24.085 50.215,24.085 50.7,23.6 v1(50.7,22.9) ; v1(49.7,7.7) 49.72,7.72 49.72,8.4 49.815,8.495 49.815,8.545 50.115,8.845 50.215,8.845 50.7,8.36 v1(50.7,7.7) ; v1(49.7,30.7) 49.73,30.67 49.73,30 49.845,29.885 49.845,29.82 50.1,29.565 50.23,29.565 50.485,29.82 50.485,29.885 50.6,30 v1(50.6,30.7) ; v1(49.8,15.5) 49.8,14.76 49.915,14.645 49.915,14.58 50.17,14.325 50.3,14.325 50.7,14.725 v1(50.7,15.5)
NetC23_2: C23.2 CON_IGN_12V.5 CON_IGN_12V.6 D31.1 Relais.2 T21.4 | length 73.8
  Top Layer w0.5: C23.2 T21.4
  Top Layer w0.7: CON_IGN_12V.5 25.795,60.595 25.795,59.199 27.94,57.054 27.94,53.498 ; T21.4 26.67,52.228 27.94,53.498 ; v1(54.483,45.37) 47.445,45.37 47.02,45.795 46.048,46.767 36.83,46.767 34.925,48.672 34.925,52.343 34.638,52.63 34.638,52.644 33.69,53.592 28.034,53.592 27.94,53.498
  Top Layer w2: CON_IGN_12V.5 CON_IGN_12V.6
  Bottom Layer w0.7: v1(54.483,45.37) 59.055,45.37 66.675,52.99 Relais.2
NetC41_2: C41.2 uC.6 | length 1.9
  Top Layer w0.5: C41.2@30.503,35.868 30.515,35.88 uC.6@32.385,35.88
NetC42_1: C42.1 FB41.1 uC.7 | length 19
  Top Layer w0.3: C42.1@29.519,42.449 C42.1@30.294,42.449
  Top Layer w0.5: FB41.1 27.995,40.925 C42.1@29.519,42.449 ; C42.1@30.294,42.449 C42.1@30.962,42.449 ; C42.1@31.75,42.195 34.503,39.442 34.503,35.385 34.21,35.092 uC.7
NetC51_2: C51.2 uC.17 Y51.1 | length 4.2
  Top Layer w0.3: uC.17 38.147,28.591 37.719,28.163 37.719,26.778 38.177,26.32 Y51.1
NetC52_2: C52.2 uC.16 Y51.3 | length 7
  Top Layer w0.3: Y51.3 36.203,24.796 36.908,24.796 37.084,24.972 37.084,27.082 36.704,27.462 36.704,27.843 36.449,28.098 36.704,28.353 36.704,28.573 37.305,29.174 37.305,30.1 uC.16
NetC61_1: C61.1 IC61.3 | length 2.3
  Top Layer w0.5: C61.1 IC61.3
NetC61_2: C61.2 IC61.1 | length 9
  Top Layer w0.5: IC61.1 17.78,9.81 18.288,9.302 19.939,9.302 20.32,9.683 C61.2
NetC62_2: C62.2 IC61.2 | length 2.3
  Top Layer w0.5: C62.2 IC61.2
NetC63_1: C63.1 IC61.5 | length 2.3
  Top Layer w0.5: IC61.5 22.895,14.575 22.895,12.385 C63.1
NetC63_2: C63.2 IC61.4 | length 2.3
  Top Layer w0.5: C63.2 IC61.4
NetC64_2: C64.2 IC61.6 | length 2.3
  Top Layer w0.5: C64.2 IC61.6
NetC81_2: C81.2 R81.1 R82.2 uC.39 | length 30.5
  Top Layer w0.5: R81.1 R82.2 C81.2 20.662,54.26 20.955,53.967 20.955,49.18 24.255,45.88 35.304,45.88 38.147,43.037 uC.39
NetCON_CAN_1: CON_CAN.1 CON_CAN.2 IC91.7 R111.1 | length 17.6
  Top Layer w0.5: CON_CAN.1 15.021,27.4 15.748,28.127 R111.1 15.786,29.845 16.891,29.845 17.176,30.13 IC91.7 IC91.7@18.855,30.107
  Top Layer w2: CON_CAN.2 CON_CAN.1
NetCON_CAN_3: CON_CAN.3 CON_CAN.4 IC91.6 R111.2 | length 15.4
  Top Layer w0.5: CON_CAN.3 IC91.6
  Top Layer w2: CON_CAN.4 CON_CAN.3
NetCON_IGN_12V_1: CON_IGN_12V.1 CON_IGN_12V.2 R81.2 | length 13.1
  Top Layer w0.5: CON_IGN_12V.1@17.145,60.61 17.145,57.978 17.438,57.685 17.885,57.685 18.085,57.485 R81.2
  Top Layer w2: CON_IGN_12V.1 CON_IGN_12V.2
NetCON_Relais_1: CON_Relais.1 CON_Relais.2 SSR.2 | length 18.8
  Top Layer w2: CON_Relais.2 CON_Relais.1 39.751,58.674 39.751,55.372 40.615,54.508 40.615,51.999 SSR.2
NetCON_Relais_3: CON_Relais.3 CON_Relais.4 SSR.1 | length 18.4
  Top Layer w2: SSR.1 CON_Relais.3 CON_Relais.4
NetCON_RS232_1: CON_RS232.1 CON_RS232.2 IC61.14 | length 20.6
  Top Layer w0.5: CON_RS232.1 12.798,18.065 13.548,18.815 13.548,19.548 14.605,20.605 18.319,20.605 20.32,22.606 IC61.14
  Top Layer w2: CON_RS232.2 CON_RS232.1
NetCON_RS232_3: CON_RS232.3 CON_RS232.4 IC61.13 | length 21.5
  Top Layer w0.5: CON_RS232.3 12.962,22.065 13.712,22.815 13.712,23.522 15.875,25.685 21.269,25.685 21.561,25.392 21.561,24.089 IC61.13
  Top Layer w2: CON_RS232.4 CON_RS232.3
NetCON_Slave_1_1: CON_Slave_1.1 CON_Slave_1.2 OC12.4 R12.2 R14.1 | length 24.9
  Top Layer w0.5: R14.1 R12.2 56.82,32.975 57.15,33.305 OC12.4 CON_Slave_1.1
  Top Layer w2: CON_Slave_1.1 CON_Slave_1.2
NetCON_Slave_2_1: CON_Slave_2.1 CON_Slave_2.2 OC72.4 R72.2 R74.1 | length 24.9
  Top Layer w0.5: R74.1@56.858,7.016 56.82,7.054 R72.2 56.82,17.735 57.15,18.065 OC72.4 CON_Slave_2.1
  Top Layer w2: CON_Slave_2.1 CON_Slave_2.2
NetCON_SSR_1: CON_SSR.1 CON_SSR.2 Relais.3 | length 17.4
  Top Layer w2: Relais.3 CON_SSR.1 CON_SSR.2
NetCON_SSR_3: CON_SSR.3 CON_SSR.4 Relais.1 | length 30.9
  Top Layer w2: CON_SSR.4 CON_SSR.3 62.515,48.162 63.687,46.99 Relais.1
NetD31_2: D31.2 Q31.3 Relais.4 | length 27.6
  Top Layer w0.5: D31.2 43.812,45.228 45.227,45.228 48.26,42.195 48.26,40.975 48.278,40.958 68.683,40.958 Relais.4
NetD41_2: D41.2 FB41.2 Micro-USB.1 | length 16.6
  Top Layer w0.3: Micro-USB.1 6.982,40.925 6.985,40.928 ; D41.2 D41.2
  Top Layer w0.4: 6.985,40.928 13.257,40.928 13.261,40.925 FB41.2
  Top Layer w0.5: D41.2 19.685,42.449 20.033,42.101 FB41.2
NetD91_1: D91.1 uC.27 | length 6.1
  Top Layer w0.5: uC.27 44.918,35.092 46.355,33.655 D91.1
NetD91_2: D91.2 uC.26 | length 4.8
  Top Layer w0.5: uC.26 44.711,34.292 45.455,33.548 D91.2
NetD91_3: D91.3 D91.4 R101.2 | length 2
  Top Layer w0.5: D91.3 D91.4 R101.2
NetIC61_11: IC61.11 S2.2 | length 33.3
  Top Layer w0.5: IC61.11 24.13,19.679 31.459,12.35 41.91,12.35 44.518,14.958 44.518,16.863 45.068,17.413 46.718,17.413 S2.2
NetIC61_12: IC61.12 S1.2 | length 20.6
  Top Layer w0.5: IC61.12 22.86,25.392 23.153,25.685 29.845,25.685 34.29,21.24 34.29,18.145 34.965,17.47 S1.2
NetIC91_1: IC91.1 S2.5 | length 23.2
  Top Layer w0.5: IC91.1 27.813,28.86 34.29,22.383 38.227,22.383 39.37,21.24 39.37,18.725 40.625,17.47 S2.5
NetIC91_4: IC91.4 S1.5 | length 20.2
  Top Layer w0.5: IC91.4 26.035,32.67 v1(28.575,30.13) ; v1(28.575,23.78) 28.575,18.415 29.52,17.47 S1.5
  Bottom Layer w0.5: v1(28.575,23.78) v1(28.575,30.13)
NetIC91_8: IC91.8 R91.1 uC.9 | length 19
  Top Layer w0.5: IC91.8 20.662,28.86 20.79,28.988 ; R91.1 20.79,28.988 ; uC.9 21.777,33.492 20.79,32.505 20.79,28.988
NetMicro-USB_2: Micro-USB.2 R41.2 | length 22.3
  Top Layer w0.3: Micro-USB.2 8.143,40.275 9.779,38.639 R41.2
NetMicro-USB_3: Micro-USB.3 R42.2 | length 22.7
  Top Layer w0.3: Micro-USB.3 7.523,39.625 10.033,37.115 R42.2
NetOC11_1: OC11.1 R12.1 | length 1.9
  Top Layer w0.5: R12.1 OC11.1
NetOC11_4: OC11.4 R11.1 uC.29 | length 17.9
  Top Layer w0.5: uC.29 46.778,36.692 48.895,34.575 48.895,25.978 49.188,25.685 R11.1 OC11.4
NetOC12_1: OC12.1 R13.1 | length 2.1
  Top Layer w0.5: R13.1 OC12.1
NetOC71_1: OC71.1 R72.1 | length 1.9
  Top Layer w0.5: R72.1 OC71.1
NetOC71_4: OC71.4 R71.1 uC.18 | length 31.8
  Top Layer w0.5: uC.18 38.947,31.253 39.352,31.659 42.321,31.659 43.18,30.8 43.18,27.32 48.895,21.605 48.895,10.738 49.188,10.445 R71.1 OC71.4
NetOC72_1: OC72.1 R73.1 | length 2.1
  Top Layer w0.5: R73.1 OC72.1
NetQ31_1: Q31.1 uC.37 | length 8.1
  Top Layer w0.5: uC.37 39.747,42.533 40.561,43.347 43.298,43.347 44.77,41.875 Q31.1
NetR13_2: R13.2 uC.30 | length 7.9
  Top Layer w0.5: uC.30 48.518,37.492 50.165,35.845 R13.2
NetR31_1: R31.1 uC.38 | length 10.3
  Top Layer w0.5: R31.1 35.179,47.275 38.947,43.507 uC.38
NetR31_2: R31.2 SSR.4 | length 4.7
  Top Layer w0.5: R31.2 SSR.4
NetR41_1: R41.1 uC.3 | length 3.6
  Top Layer w0.5: R41.1 30.226,38.639 30.573,38.292 uC.3
NetR42_1: R42.1 uC.4 | length 3.6
  Top Layer w0.5: R42.1 30.226,37.115 30.603,37.492 uC.4
NetR73_2: R73.2 uC.28 | length 19.6
  Top Layer w0.5: uC.28 45.292,35.892 47.752,33.432 47.752,23.742 50.165,21.329 R73.2
NetS1_1: S1.1 S1.4 uC.10 | length 24
  Top Layer w0.5: v1(30.48,22.51) 31.33,21.66 S1.4 31.347,19.953 33.037,19.953 33.587,19.403 33.587,16.306 34.608,15.285 34.608,15.263 34.901,14.97 S1.1 ; v1(30.48,28.86) 30.48,32.035 31.137,32.692 uC.10
  Bottom Layer w0.5: v1(30.48,22.51) v1(30.48,28.86)
NetS1_3: S1.3 S1.6 uC.20 | length 22.8
  Top Layer w0.5: S1.6 31.37,14.93 33.615,14.93 v1(33.655,14.89) ; S1.3 36.95,19.97 37.3,20.32 v1(37.3,21.4) ; v1(40.513,24.542) 40.547,24.576 uC.20
  Bottom Layer w0.5: v1(33.655,14.89) 37.3,18.535 v1(37.3,21.4) 38.4,21.4 40.513,23.513 v1(40.513,24.542)
NetS2_1: S2.1 S2.4 uC.11 | length 27.1
  Top Layer w0.5: uC.11 32.397,25.419 34.671,23.145 39.37,23.145 41.275,21.24 S2.4 v1(43.18,19.97) ; v1(45.221,16.16) 45.221,15.874 46.125,14.97 S2.1
  Bottom Layer w0.5: v1(43.18,19.97) 45.221,17.929 v1(45.221,16.16)
NetS2_3: S2.3 S2.6 uC.21 | length 22.2
  Top Layer w0.5: S2.6 43.26,14.97 43.815,15.525 43.815,19.335 44.45,19.97 S2.3 46.775,21.455 41.347,26.883 uC.21
S_GND_1: CON_Slave_1.3 CON_Slave_1.4 OC11.2 OC12.3 | length 15
  Top Layer w0.5: OC11.2 58.42,29.495 ; OC12.3 58.42,29.495 ; CON_Slave_1.3 59.245,29.305 59.055,29.495 58.42,29.495
  Top Layer w2: CON_Slave_1.3 CON_Slave_1.4
S_GND_2: CON_Slave_2.3 CON_Slave_2.4 OC71.2 OC72.3 | length 15.7
  Top Layer w0.5: OC71.2 58.42,14.255 ; OC72.3 58.42,14.255 ; CON_Slave_2.3@61.15,13.62 CON_Slave_2.3 59.245,14.065 59.055,14.255 58.42,14.255
  Top Layer w2: CON_Slave_2.3 CON_Slave_2.4
S_Vcc_1: CON_Slave_1.5 CON_Slave_1.6 R14.2 | length 15
  Top Layer w0.5: R14.2 60.706,22.256 61.595,23.145 CON_Slave_1.5
  Top Layer w2: CON_Slave_1.5 CON_Slave_1.6
S_Vcc_2: CON_Slave_2.5 CON_Slave_2.6 R74.2 | length 14.9
  Top Layer w0.5: R74.2@58.458,7.016 60.706,7.016 61.595,7.905 CON_Slave_2.5
  Top Layer w2: CON_Slave_2.5 CON_Slave_2.6
pads on no net: IC61.7 IC61.8 IC61.9 IC61.10 IC91.5 Micro-USB.4 uC.1 uC.8 uC.12 uC.13 uC.19 uC.22 uC.25 uC.31 uC.32 uC.33 uC.36 uC.40 uC.41 uC.42

## Polygon pours and split planes (outlines as drawn)
M_GND on Mid Layer 1 "M_GND_L02_P000" (solid, pour order 0): 1,3.54 ccw(c3.54,3.54) 3.54,1 70.96,1 ccw(c70.96,3.54) 73.5,3.54 73.5,70.46 ccw(c70.96,70.46) 70.96,73 3.5,73 ccw(c3.5,70.5) 1,70.5
M_Vcc on Mid Layer 2 "M_VCC_L03_P005" (solid, pour order 5): 1,3.54 ccw(c3.54,3.54) 3.54,1 70.96,1 ccw(c70.96,3.54) 73.5,3.54 73.5,70.46 ccw(c70.96,70.46) 70.96,73 3.5,73 ccw(c3.5,70.5) 1,70.5
M_GND on Bottom Layer "M_GND_L04_P006" (solid, pour order 6): 1,3.54 ccw(c3.54,3.54) 3.54,1 70.96,1 ccw(c70.96,3.54) 73.5,3.54 73.5,70.46 ccw(c70.96,70.46) 70.96,73 3.5,73 ccw(c3.5,70.5) 1,70.5

## Other copper
Mid Layer 1:
  pour cut-out: 73.66,73.152 35.179,73.152 35.179,48.895 55.301,48.895 55.301,0.635 73.66,0.635
Mid Layer 2:
  pour cut-out: 73.66,73.152 35.179,73.152 35.179,48.895 55.301,48.895 55.301,0.635 73.66,0.635
Bottom Layer:
  pour cut-out: 73.66,73.152 35.179,73.152 35.179,48.895 55.301,48.895 55.301,0.635 73.66,0.635

## Silkscreen, mask and mechanical layers (free items; w line width, h text height)
Top Overlay:
  drawing of 34 lines, arcs and shapes, not listed
  text "Ignition" at 28.016,72.644 h1.15 r270
  text "GND" at 28.969,72.644 h1.15 r270
  text "12V" at 29.972,72.644 h1.15 r270
  text "Solid State Relais" at 49.289,72.644 h1.15 r270
  text "Relais" at 66.052,72.644 h1.15 r270
  text "BMS-Master V1.0 / Tristan Horvath / 2021/22" at 3.302,45.72 h1.52
  text "COM" at 70.612,37.465 h1.15
  text "S-GND" at 70.612,36.576 h1.15
  text "S-VCC" at 70.612,35.687 h1.15
  text "CANL" at 10.795,34.557 h1.15
  text "CANH" at 10.795,33.541 h1.15
  text "COM" at 70.485,22.225 h1.15
  text "S-GND" at 70.485,21.336 h1.15
  text "HW-Serial" at 36.068,21.226 h1.52
  text "S-VCC" at 70.485,20.447 h1.15
  text "Rx" at 10.795,15.113 h1.15
  text "Tx" at 10.795,14.097 h1.15
  text "SW-Serial" at 36.068,12.717 h1.52
Kontur:
  lines w0.254: 0,3.365 ccw(c3.365,3.365) 3.365,0 71.086,0 ccw(c71.086,3.414) 74.5,3.414 74.5,70.586 ccw(c71.086,70.586) 71.086,74 5.5,74 3.365,74 ccw(c3.365,70.635) 0,70.635 0,70 0,3.365